# Altium PCB Carrier with Power Supply.PcbDoc (part 2 of 4)
Units mm, origin at the board's own origin, x right, y up, seen from the top; angles counter-clockwise.
Board outline 756.27 x 168 mm, 6 copper layers (Top Layer, Signal Layer 2, Signal Layer 1, VCC, GND, Bottom Layer), stack 1.551 mm thick; 145 components, 326 nets, 1962 pads, 760 vias.
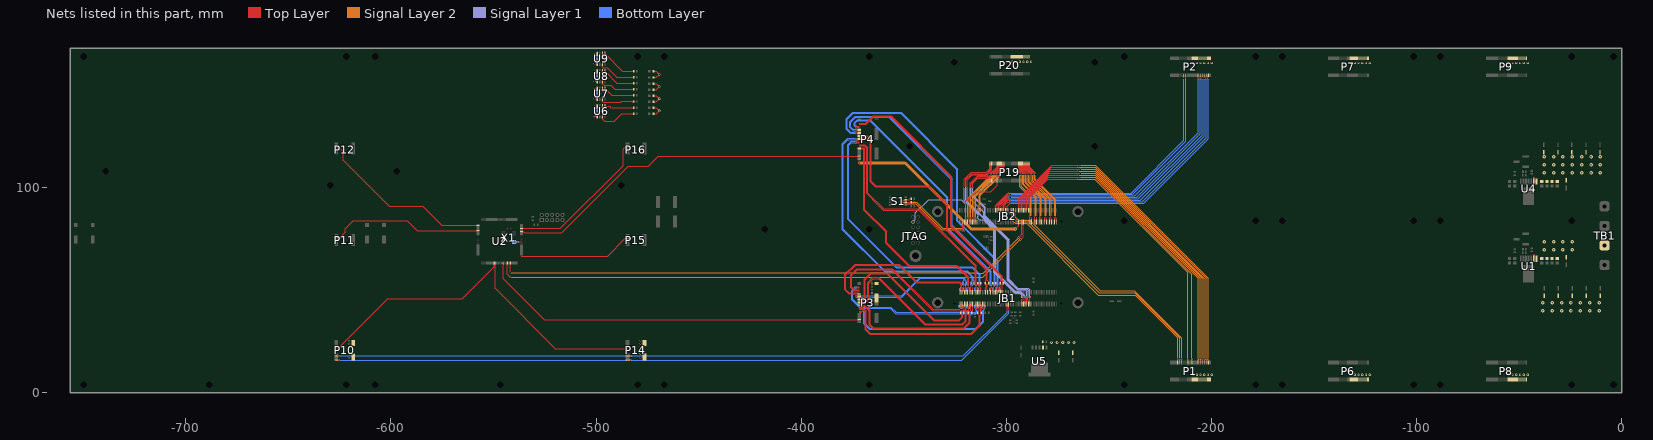
[diagram p6: the nets of this part, all layers, seen from the top]

## Via types
v1: diameter 0.5, hole 0.3, Top Layer to Bottom Layer, 213 vias
v2: diameter 0.9, hole 0.5, Top Layer to Bottom Layer, 182 vias
v3: diameter 0.7, hole 0.3, Top Layer to Bottom Layer, 112 vias
v4: diameter 1.1, hole 0.7, Top Layer to Bottom Layer, 84 vias
v5: diameter 1.5, hole 0.7, Top Layer to Bottom Layer, 59 vias
v6: diameter 1.7, hole 0.7, Top Layer to Bottom Layer, 58 vias
v7: diameter 0.8, hole 0.3, Top Layer to Bottom Layer, 36 vias
v8: diameter 0.9, hole 0.3, Top Layer to Bottom Layer, 6 vias
v9: diameter 1, hole 0.5, Top Layer to Bottom Layer, 4 vias
v10: diameter 1.1, hole 0.5, Top Layer to Bottom Layer, 4 vias
v11: diameter 0.7, hole 0.5, Top Layer to Bottom Layer, 1 vias
v12: diameter 1.3, hole 0.7, Top Layer to Bottom Layer, 1 vias

## Nets (pads, with @x,y where several pads share a name; then routed paths per layer and width w, separated by ;. In a path a pad name is that pad's centre, name@x,y a point inside that pad or via, vN(x,y) a via of type N, cw(c..) or ccw(c..) an arc to the next point about the centre after c; other vN are vias at no path point) (continued)
+5V: C20.1 C21.1 C22.1 C24.1 C25.1 C30.1 C32.1 C33.1 C34.1 C35.1 C37.1 C38.1 C39.1 C40.1 C41.1 C44.1 C45.1 C46.1 C47.1 C48.1 C49.1 C50.1 C51.1 C52.1 C53.1 C54.1 D1.1 D2.1 D3.1 D4.1 D5.1 D6.1 D7.1 D8.1 P1.43 P1.45 P1.47 P1.49 P1.51 P1.53 P1.55 P1.57 P1.59 P1.61 P1.63 P1.65 P1.67 P1.69 P1.71 P1.73 P1.75 P1.77 P1.79 P2.44 P2.46 P2.48 P2.50 P2.52 P2.54 P2.56 P2.58 P2.60 P2.62 P2.64 P2.66 P2.68 P2.70 P2.72 P2.74 P2.76 P2.78 P2.80 P3.2 P3.4 P3.6 P3.8 P3.10 P3.12 P3.14 P3.16 P3.18 P3.20 P3.22 P3.24 P3.26 P3.28 P3.30 P3.32 P3.34 P3.36 P3.38 P3.40 P6.43 P6.45 P6.47 P6.49 P6.51 P6.53 P6.55 P6.57 P6.59 P6.61 P6.63 P6.65 P6.67 P6.69 P6.71 P6.73 P6.75 P6.77 P6.79 P7.44 P7.46 P7.48 P7.50 P7.52 P7.54 P7.56 P7.58 P7.60 P7.62 P7.64 P7.66 P7.68 P7.70 P7.72 P7.74 P7.76 P7.78 P7.80 P8.43 P8.45 P8.47 P8.49 P8.51 P8.53 P8.55 P8.57 P8.59 P8.61 P8.63 P8.65 P8.67 P8.69 P8.71 P8.73 P8.75 P8.77 P8.79 P9.44 P9.46 P9.48 P9.50 P9.52 P9.54 P9.56 P9.58 P9.60 P9.62 P9.64 P9.66 P9.68 P9.70 P9.72 P9.74 P9.76 P9.78 P9.80 P10.2 P10.4 P10.6 P10.8 P10.10 P10.12 P10.14 P10.16 P10.18 P10.20 P10.22 P10.24 P10.26 P10.28 P10.30 P10.32 P10.34 P10.36 P10.38 P10.40 P14.2 P14.4 P14.6 P14.8 P14.10 P14.12 P14.14 P14.16 P14.18 P14.20 P14.22 P14.24 P14.26 P14.28 P14.30 P14.32 P14.34 P14.36 P14.38 P14.40 P20.1 P20.3 P20.5 P20.7 P20.9 P20.11 P20.13 P20.15 P20.17 P20.19 P20.21 P20.23 P20.25 P20.27 P20.29 P20.31 P20.33 P20.35 P20.37 P20.39 R37.2 TB1.2 U1.1 U1.2 U4.1 U4.2 U5.2 U6.1 U6.6 U6.8 U7.1 U7.6 U7.8 U8.1 U8.6 U8.8 U9.1 U9.6 U9.8 | length 77.1
  Top Layer w0.3: v3(-500.763,134.908) U6.1@-499.415,134.908 ; v3(-500.763,139.708) U6.8@-499.415,139.708 ; v3(-500.763,143.425) U7.1@-499.415,143.425 ; v3(-500.763,148.225) U7.8@-499.415,148.225 ; v3(-500.763,151.941) U8.1@-499.415,151.941 ; v3(-500.763,156.741) U8.8@-499.415,156.741 ; v3(-500.763,160.458) U9.1@-499.415,160.458 ; v3(-500.763,165.258) U9.8@-499.415,165.258 ; U6.6@-496.875,139.708 -496.875,138.713 v3(-496.02,137.858) ; U7.6@-496.875,148.225 -496.875,147.23 v3(-496.02,146.375) ; U8.6@-496.875,156.741 -496.875,155.746 v3(-496.02,154.891) ; U9.6@-496.875,165.258 -496.875,164.263 v3(-496.02,163.408) ; P3.40@-363.31,44.298 P3.38@-363.31,44.798 ; P20.39@-298.02,163.828 P20.37@-297.52,163.828
  Top Layer w0.5: D1.1@-472.002,136.021 -470.567,136.021 -469.115,137.473 -470.623,138.981 D2.1@-472.002,138.981 ; D3.1@-472.002,141.94 -470.567,141.94 -469.115,143.392 -470.623,144.9 D4.1@-472.002,144.9 ; D5.1@-472.002,147.86 -470.567,147.86 -469.115,149.312 -470.623,150.82 D6.1@-472.002,150.82 ; D7.1@-472.002,153.779 -470.567,153.779 -469.115,155.231 -470.623,156.739 D8.1@-472.002,156.739
  Top Layer w0.9: U1.2@-42.847,65.469 -42.847,67.129 -42.777,67.199 ; -42.777,104.848 -42.847,104.778 U4.2@-42.847,103.118 U4.1@-41.577,103.118
  Bottom Layer w0.3: v3@-500.763,134.755 -499.415,136.103 C37.1@-499.415,137.218 -499.415,138.206 v3@-500.763,139.555 ; v3(-500.763,143.425) -499.415,144.773 C38.1@-499.415,145.888 -499.415,146.876 v3(-500.763,148.225) ; v3@-500.763,151.845 -499.415,153.193 C39.1@-499.415,154.308 -499.415,155.296 v3@-500.763,156.645 ; v3@-500.763,160.435 -499.415,161.783 C40.1@-499.415,162.898 -499.415,163.886 v3@-500.763,165.235
  other v2: -620.33,17.14 -478.33,17.14 -620.33,19.15 -478.33,19.15 -620.33,21.1 -478.33,21.1 -620.33,22.543 -478.33,22.543 -620.33,23.987 -478.33,23.987 -620.33,25.43 -478.33,25.43 -365.51,45.63 -365.51,48.78 -365.51,50.283 -365.51,51.787 -365.51,53.29
  other v4: -209.02,8.87 -207.186,8.87 -205.352,8.87 -203.518,8.87 -201.684,8.87 -199.85,8.87 -132.02,8.87 -130.186,8.87 -128.352,8.87 -126.518,8.87 -124.684,8.87 -122.85,8.87 -55.02,8.87 -53.186,8.87 -51.352,8.87 -49.518,8.87 -47.684,8.87 -45.85,8.87 -209.02,160.86 -207.186,160.86 -205.352,160.86 -203.518,160.86 -201.684,160.86 -199.85,160.86 -132.02,160.86 -130.186,160.86 -128.352,160.86 -126.518,160.86 -124.684,160.86 -122.85,160.86 -55.02,160.86 -53.186,160.86 -51.352,160.86 -49.518,160.86 -47.684,160.86 -45.85,160.86 -297.064,161.481 -295.23,161.481 -293.396,161.481 -291.562,161.481 -289.728,161.481 -287.894,161.481
  other v5: -277.97,24.66 -275.23,24.66 -272.49,24.66 -269.75,24.66 -267.01,24.66
  other v6: -38.397,40.15 -33.837,40.15 -29.277,40.15 -24.717,40.15 -20.157,40.15 -15.597,40.15 -11.037,40.15 -38.397,44.01 -33.837,44.01 -29.277,44.01 -24.717,44.01 -20.157,44.01 -15.597,44.01 -11.037,44.01 -37.75,69.901 -33.19,69.901 -28.63,69.901 -24.07,69.901 -37.75,73.761 -33.19,73.761 -28.63,73.761 -24.07,73.761 -37.75,107.43 -33.19,107.43 -28.63,107.43 -24.07,107.43 -19.51,107.43 -14.95,107.43 -10.39,107.43 -37.75,111.29 -33.19,111.29 -28.63,111.29 -24.07,111.29 -19.51,111.29 -14.95,111.29 -10.39,111.29 -37.75,115.15 -33.19,115.15 -28.63,115.15 -24.07,115.15 -19.51,115.15 -14.95,115.15 -10.39,115.15
  other v10: -469.15,137.508 -469.15,143.427 -469.15,149.347 -469.15,155.266
ADC_N1: JB1.116 P3.15 R29.1 | length 77.9
  Top Layer w0.3: P3.15@-371.61,50.298 -374.177,50.298 -375.297,51.418 -375.297,57.411 -372.57,60.138 -355.851,60.138 -335.871,40.158 -321.969,40.158 -321.387,40.739 -321.387,41.891 -321.237,42.041 JB1.116@-321.237,43.328
  Bottom Layer w0.3: v1(-321.417,40.758) -321.417,41.398 -321.277,41.538 R29.1@-321.277,42.288
ADC_N2: JB1.117 P3.21 R21.1 | length 81.6
  Top Layer w0.3: P3.21@-371.61,48.798 -376.537,48.798 -378.147,50.408 -378.147,57.571 -373.43,62.288 -352.495,62.288 -343.824,53.617 -322.994,53.617 -321.917,52.541 -321.917,52.058 v1(-322.037,51.938) -322.037,51.541 JB1.117@-322.037,49.391
  Bottom Layer w0.3: R21.1@-322.47,50.268 -322.47,51.018 -322.037,51.451 v1(-322.037,51.938)
ADC_N3: JB1.111 P3.27 R20.2 | length 65.1
  Top Layer w0.3: v1@-373.16,47.298 P3.27@-371.61,47.298 ; JB1.111@-319.637,49.391 v1(-319.637,51.938)
  Bottom Layer w0.3: v1(-373.19,47.398) -351.077,47.398 -342.037,56.438 -321.04,56.438 -320.107,55.505 -320.107,54.818 -319.567,54.278 R20.2@-319.567,53.528 -319.567,52.778 -319.637,52.708 v1(-319.637,51.938)
ADC_N4: JB1.114 P3.33 R28.2 | length 77.7
  Top Layer w0.3: P3.33@-371.61,45.798 -369.892,45.798 -369.28,46.41 -369.28,55.372 -366.138,58.514 -358.087,58.514 -335.23,35.658 -323.067,35.658 -321.707,37.018 -321.707,37.768 -322.257,38.318 R28.2@-322.257,39.068 -320.437,40.888 JB1.114@-320.437,43.168 ; R28.2@-322.377,39.068 R28.2@-322.377,39.195
ADC_N5: JB1.110 P3.39 R27.2 | length 82.1
  Top Layer w0.3: P3.39@-371.61,44.298 -368.994,44.298 -367.607,45.685 -367.607,53.665 -364.988,56.284 -362.027,56.284 -361.88,56.138 -339.394,33.652 -321.344,33.652 -319.947,35.048 -319.947,39.77 -319.189,40.528 -318.937,40.528 v1(-318.837,40.628) -318.687,40.778 -318.687,41.891 -318.837,42.041 JB1.110@-318.837,43.328
  Bottom Layer w0.3: R27.2@-319.257,42.288 -319.257,41.538 -318.837,41.118 v1(-318.837,40.628)
ADC_N6: JB1.106 P3.45 R26.2 | length 72.7
  Top Layer w0.3: P3.45@-371.61,42.798 -369.11,42.798 -366.434,40.122 -366.287,39.975 -366.287,33.268 -364.77,31.751 -320.734,31.751 -317.967,34.518 -317.967,37.788 -318.497,38.318 R26.2@-318.497,39.068 -317.237,40.328 JB1.106@-317.237,43.168
ADC_N7: JB1.96 P3.51 R24.2 | length 80.9
  Top Layer w0.3: P3.51@-371.61,41.298 -369.67,41.298 -368.167,39.795 -368.167,31.001 -366.247,29.081 -317.124,29.081 -313.267,32.938 -313.267,37.748 -313.837,38.318 R24.2@-313.837,39.068 -313.837,39.818 -313.237,40.418 JB1.96@-313.237,43.168
ADC_N8: JB1.92 P3.57 R23.2 | length 78.1
  Top Layer w0.3: P3.57@-371.61,39.798 v1@-370.06,39.798 ; v1(-311.637,40.628) -311.637,41.018 JB1.92@-311.637,43.168
  Bottom Layer w0.3: v1(-370.03,39.898) -369.93,39.798 -369.723,39.798 -368.927,39.002 -368.927,33.901 -366.487,31.461 -314.994,31.461 -311.467,34.988 -311.467,40.458 v1(-311.637,40.628) -311.637,41.098 -312.077,41.538 R23.2@-312.077,42.288
ADC_N9: JB1.81 P4.15 R8.1 | length 120.4
  Top Layer w0.3: v1@-373.16,129.978 P4.15@-371.61,129.978 ; v1(-307.67,51.938) -307.637,51.905 JB1.81@-307.637,49.391
  Bottom Layer w0.3: v1(-373.19,130.078) -373.607,130.495 -373.607,131.618 -372.445,132.78 -366.629,132.78 -328.98,95.131 -328.98,79.981 -307.877,58.878 -307.877,52.288 -307.67,52.081 v1(-307.67,51.938) -307.67,51.408 -308.06,51.018 R8.1@-308.06,50.268
ADC_N10: JB1.77 P4.21 R7.1 | length 134.7
  Top Layer w0.3: v1@-373.16,128.478 P4.21@-371.61,128.478 ; R7.1@-306.64,53.528 -306.04,52.928 v1(-306.04,51.938) -306.037,51.935 JB1.77@-306.037,49.391
  Bottom Layer w0.3: v1(-373.19,128.578) -374.667,128.578 -375.727,129.638 -375.727,132.078 -373.315,134.49 -357.219,134.49 -326.95,104.221 -326.95,81.601 -305.897,60.548 -305.897,52.081 v1(-306.04,51.938)
ADC_N11: JB1.73 P4.27 R6.1 | length 146.8
  Top Layer w0.3: v1@-373.16,126.978 P4.27@-371.61,126.978 ; JB1.73@-304.437,49.391 -304.437,51.541 -304.43,51.548 v1(-304.43,51.938)
  Bottom Layer w0.3: v1(-373.19,127.078) -375.917,127.078 -377.517,128.678 -377.517,133.418 -374.675,136.26 -351.519,136.26 -324.077,108.818 -324.077,83.838 -304.297,64.058 -304.297,52.071 v1(-304.43,51.938) -304.43,51.458 -304.87,51.018 R6.1@-304.87,50.268
ADC_N12: JB1.85 P4.33 R9.2 | length 119.9
  Top Layer w0.3: P4.33@-371.61,125.478 -367.64,125.478 -366.057,123.895 -365.79,123.628 -365.79,103.124 -363.567,100.901 -337.77,100.901 -335.535,98.665 -329.477,92.608 -328.417,91.548 -328.417,79.358 -317.497,68.438 -309.167,60.108 -309.167,54.825 -308.62,54.278 R9.2@-308.62,53.528 -309.207,52.941 -309.207,51.571 -309.237,51.541 JB1.85@-309.237,49.391
ADC_N13: JB1.105 P4.39 R13.1 | length 131.4
  Top Layer w0.3: v1@-373.16,123.978 P4.39@-371.61,123.978 ; JB1.105@-317.237,49.391 v1(-317.237,51.938)
  Bottom Layer w0.3: v1(-373.19,124.078) -377.348,124.078 -379.851,121.575 -379.997,121.428 -379.997,79.621 -359.337,58.961 -319.307,58.961 -316.627,56.281 -316.627,54.811 -317.157,54.281 R13.1@-317.157,53.531 -317.157,52.018 v1(-317.237,51.938)
ADC_N14: JB1.95 P4.45 R11.1 | length 128
  Top Layer w0.3: v1@-373.16,122.478 P4.45@-371.61,122.478 ; R11.1@-313.98,53.528 -313.407,52.955 -313.407,52.108 v1(-313.237,51.938) JB1.95@-313.237,49.391
  Bottom Layer w0.3: v1(-373.19,122.578) -375.558,122.578 -377.227,120.908 -377.227,84.551 -353.747,61.071 -316.71,61.071 -313.087,57.448 -313.087,52.088 v1(-313.237,51.938)
ADC_N15: JB1.97 P4.51 R12.2 | length 108.9
  Top Layer w0.3: P4.51@-371.61,120.978 -369.007,120.978 -367.47,119.441 -367.47,97.454 -359.696,89.68 -342.343,89.68 -314.717,62.055 -314.717,52.741 -314.037,52.061 JB1.97@-314.037,49.391
  Bottom Layer w0.3: v1(-314.007,51.901) -314.007,51.355 -313.67,51.018 R12.2@-313.67,50.268
ADC_N16: JB1.107 P4.57 R14.2 | length 109
  Top Layer w0.3: P4.57@-371.61,119.478 -369.501,119.478 -368.88,118.857 -368.88,89.26 -358.33,78.71 -358.33,73.201 -347.41,62.281 -324.09,62.281 -318.187,56.378 -318.187,52.088 v1(-318.037,51.938) JB1.107@-318.037,49.391
  Bottom Layer w0.3: v1(-318.037,51.938) -318.037,51.425 -317.63,51.018 R14.2@-317.63,50.268
ADC_P1: JB1.118 P3.17 R29.2 | length 78.8
  Top Layer w0.3: P3.17@-371.61,49.798 -374.384,49.798 -375.797,51.211 -375.797,57.618 -372.777,60.638 -355.643,60.638 -335.683,40.678 -322.297,40.678 v1(-322.217,40.758) -322.037,40.938 JB1.118@-322.037,43.328
  Bottom Layer w0.3: R29.2@-322.877,42.288 -322.217,41.628 v1(-322.217,40.758)
ADC_P2: JB1.115 P3.23 R21.2 | length 84.1
  Top Layer w0.3: P3.23@-371.61,48.298 -376.744,48.298 -378.501,50.054 -378.647,50.201 -378.647,57.778 -373.637,62.788 -352.287,62.788 -343.617,54.117 -322.787,54.117 -321.417,52.748 -321.417,52.118 v1(-321.237,51.938) JB1.115@-321.237,49.391
  Bottom Layer w0.3: v1(-321.237,51.938) -321.237,51.385 -320.87,51.018 R21.2@-320.87,50.268
ADC_P3: JB1.113 P3.29 R20.1 | length 64.7
  Top Layer w0.3: v1@-373.16,46.798 P3.29@-371.61,46.798 ; JB1.113@-320.437,49.391 -320.437,51.541 v1(-320.437,51.938)
  Bottom Layer w0.3: v1(-373.19,46.698) -351.07,46.698 -341.83,55.938 -321.247,55.938 -320.607,55.298 -320.607,54.838 -321.167,54.278 R20.1@-321.167,53.528 -320.437,52.798 v1(-320.437,51.938)
ADC_P4: JB1.112 P3.35 R28.1 | length 78.1
  Top Layer w0.3: P3.35@-371.61,45.298 -369.685,45.298 -368.78,46.203 -368.78,55.165 -365.931,58.014 -358.294,58.014 -335.437,35.158 -322.86,35.158 -321.207,36.811 -321.207,37.768 -320.657,38.318 R28.1@-320.657,39.068 -320.657,39.767 -319.637,40.787 JB1.112@-319.637,43.168
ADC_P5: JB1.108 P3.41 R27.1 | length 83
  Top Layer w0.3: P3.41@-371.61,43.798 -368.787,43.798 -367.107,45.478 -367.107,53.458 -364.781,55.784 -362.234,55.784 -339.747,33.298 -339.601,33.152 -321.137,33.152 -319.447,34.841 -319.447,39.563 -318.982,40.028 -318.589,40.028 -318.187,40.429 -318.187,41.891 -318.037,42.041 JB1.108@-318.037,43.328
  Bottom Layer w0.3: v1(-318.037,40.628) -318.037,41.158 -317.657,41.538 R27.1@-317.657,42.288
ADC_P6: JB1.104 P3.47 R26.1 | length 73.2
  Top Layer w0.3: P3.47@-371.61,42.298 -369.317,42.298 -366.787,39.768 -366.787,33.061 -364.977,31.251 -320.527,31.251 -320.514,31.264 -317.467,34.311 -317.467,37.748 -316.897,38.318 R26.1@-316.897,39.068 -316.897,39.818 -316.437,40.278 JB1.104@-316.437,43.168
ADC_P7: JB1.94 P3.53 R24.1 | length 81.5
  Top Layer w0.3: P3.53@-371.61,40.798 -369.877,40.798 -368.667,39.588 -368.667,30.794 -366.521,28.648 -366.455,28.581 -316.917,28.581 -316.85,28.648 -312.767,32.731 -312.767,37.788 -312.237,38.318 R24.1@-312.237,39.068 -312.237,39.818 -312.437,40.018 JB1.94@-312.437,43.168
ADC_P8: JB1.90 P3.59 R23.1 | length 78.9
  Top Layer w0.3: P3.59@-371.61,39.298 v1@-370.06,39.298 ; v1(-310.837,40.628) JB1.90@-310.837,43.168
  Bottom Layer w0.3: v1(-370.03,39.198) -369.93,39.298 -369.427,38.795 -369.427,33.694 -366.694,30.961 -314.787,30.961 -310.967,34.781 -310.967,40.498 v1(-310.837,40.628) -310.837,41.178 -310.477,41.538 R23.1@-310.477,42.288
ADC_P9: JB1.79 P4.17 R8.2 | length 123.2
  Top Layer w0.3: v1@-373.16,129.478 P4.17@-371.61,129.478 ; JB1.79@-306.837,49.391 -306.837,51.921 v1(-306.82,51.938)
  Bottom Layer w0.3: v1(-373.19,129.378) -373.339,129.378 -374.107,130.147 -374.107,131.825 -372.652,133.28 -366.422,133.28 -328.48,95.338 -328.48,80.188 -307.377,59.085 -307.377,52.495 v1(-306.82,51.938) -306.82,51.378 -306.46,51.018 R8.2@-306.46,50.268
ADC_P10: JB1.75 P4.23 R7.2 | length 137.1
  Top Layer w0.3: v1@-373.16,127.978 P4.23@-371.61,127.978 ; JB1.75@-305.237,49.391 -305.237,51.931 v1(-305.23,51.938) -305.23,53.338 R7.2@-305.04,53.528
  Bottom Layer w0.3: v1(-373.19,127.878) -374.674,127.878 -376.081,129.284 -376.227,129.431 -376.227,132.285 -376.081,132.432 -374.121,134.392 -373.522,134.99 -357.012,134.99 -326.45,104.428 -326.45,81.808 -305.397,60.755 -305.397,52.105 v1(-305.23,51.938)
ADC_P11: JB1.71 P4.29 R6.2 | length 149.4
  Top Layer w0.3: v1@-373.16,126.478 P4.29@-371.61,126.478 ; v1(-303.66,51.938) -303.66,51.564 -303.637,51.541 JB1.71@-303.637,49.391
  Bottom Layer w0.3: v1(-373.19,126.378) -373.339,126.378 -373.539,126.578 -376.124,126.578 -378.017,128.471 -378.017,133.625 -374.882,136.76 -351.312,136.76 -323.577,109.025 -323.577,84.045 -303.797,64.265 -303.797,52.075 v1(-303.66,51.938) -303.66,51.408 -303.27,51.018 R6.2@-303.27,50.268
ADC_P12: JB1.87 P4.35 R9.1 | length 119.1
  Top Layer w0.3: P4.35@-371.61,124.978 -367.847,124.978 -366.29,123.421 -366.29,102.917 -363.774,100.401 -337.978,100.401 -328.917,91.341 -328.917,79.151 -309.667,59.901 -309.667,54.831 -310.22,54.278 R9.1@-310.22,53.528 -309.707,53.015 -309.707,51.871 -310.037,51.541 JB1.87@-310.037,49.391
ADC_P13: JB1.103 P4.41 R13.2 | length 130.9
  Top Layer w0.3: v1@-373.16,123.478 P4.41@-371.61,123.478 ; JB1.103@-316.437,49.391 v1(-316.437,51.938)
  Bottom Layer w0.3: v1(-373.19,123.378) -377.34,123.378 -379.497,121.221 -379.497,79.828 -359.13,59.461 -319.1,59.461 -316.127,56.488 -316.127,54.851 -315.557,54.281 R13.2@-315.557,53.531 -316.437,52.651 v1(-316.437,51.938)
ADC_P14: JB1.93 P4.47 R11.2 | length 127.2
  Top Layer w0.3: v1@-373.16,121.978 P4.47@-371.61,121.978 ; JB1.93@-312.437,49.391 v1(-312.437,51.938) -312.437,51.987 -312.907,52.457 -312.907,53.001 R11.2@-312.38,53.528
  Bottom Layer w0.3: v1(-373.19,121.878) -375.55,121.878 -376.727,120.701 -376.727,84.758 -353.54,61.571 -316.503,61.571 -312.587,57.655 -312.587,52.088 v1(-312.437,51.938)
ADC_P15: JB1.99 P4.53 R12.1 | length 108
  Top Layer w0.3: P4.53@-371.61,120.478 -369.215,120.478 -367.97,119.234 -367.97,97.246 -362.535,91.811 -359.904,89.18 -342.55,89.18 -315.217,61.847 -315.217,52.534 -314.837,52.154 JB1.99@-314.837,49.391
  Bottom Layer w0.3: R12.1@-315.27,50.268 -315.27,51.018 -314.807,51.481 v1(-314.807,51.901)
ADC_P16: JB1.109 P4.59 R14.1 | length 108.2
  Top Layer w0.3: P4.59@-371.61,118.978 -369.708,118.978 -369.38,118.65 -369.38,89.053 -358.83,78.503 -358.83,72.993 -347.618,61.781 -324.298,61.781 -318.687,56.171 -318.687,52.088 v1(-318.837,51.938) -318.837,51.541 JB1.109@-318.837,49.391
  Bottom Layer w0.3: R14.1@-319.23,50.268 -319.23,51.018 -318.837,51.411 v1(-318.837,51.938)
ADCLK: JB2.48 P4.79 | length 95.2
  Top Layer w0.3: v12(-295.65,79.92) -294.037,81.533 JB2.48@-294.037,83.328
  Top Layer w0.4: v11(-371.617,112.081) -371.61,112.088 P4.79@-371.61,113.911
  Signal Layer 2 w1.5: v11(-371.617,112.081) -349.281,112.081 -317.12,79.92 v12(-295.65,79.92)
ADCLK_N1: JB1.98 P3.9 R25.1 | length 79.2
  Top Layer w0.3: v1@-373.16,51.798 P3.9@-371.61,51.798 ; JB1.98@-314.037,43.328 -314.037,42.041 -314.187,41.891 -314.187,40.778 v1(-314.037,40.628)
  Bottom Layer w0.3: v1(-373.19,51.898) -373.339,51.898 -375.427,49.809 -375.427,45.521 -371.281,41.374 -371.134,41.228 -356.444,41.228 -354.851,39.634 -353.934,38.718 -314.8,38.718 -314.177,39.341 -314.177,40.488 v1(-314.037,40.628) -314.037,41.178 -313.677,41.538 R25.1@-313.677,42.288
ADCLK_N2: JB1.67 P4.9 R5.2 | length 125.6
  Top Layer w0.3: P4.9@-371.61,131.478 -368.532,131.478 -364.876,135.134 -356.197,135.134 -326.467,105.405 -326.467,81.245 -316.82,71.598 -301.997,56.775 -301.997,54.835 -301.44,54.278 R5.2@-301.44,53.528 -302.037,52.931 JB1.67@-302.037,49.391
ADCLK_P1: JB1.100 P3.11 R25.2 | length 76.6
  Top Layer w0.3: v1@-373.16,51.298 P3.11@-371.61,51.298 ; v1(-314.837,40.628) -314.687,40.778 -314.687,41.891 -314.837,42.041 JB1.100@-314.837,43.328
  Bottom Layer w0.3: v1(-373.19,51.198) -374.927,49.461 -374.927,45.728 -370.927,41.728 -356.237,41.728 -353.727,39.218 -315.007,39.218 -314.677,39.548 -314.677,40.468 v1(-314.837,40.628) -314.837,41.098 -315.277,41.538 R25.2@-315.277,42.288
ADCLK_P2: JB1.69 P4.11 R5.1 | length 124.6
  Top Layer w0.3: P4.11@-371.61,130.978 -368.325,130.978 -364.668,134.634 -356.404,134.634 -326.967,105.198 -326.967,81.038 -302.497,56.568 -302.497,54.821 -303.04,54.278 R5.1@-303.04,53.528 -302.837,53.325 JB1.69@-302.837,49.391
BOARD_STAT: JB2.112 JTAG.9 P19.66 | length 64
  Top Layer w0.2: v1(-319.637,91.92) -319.637,93.393 -314.95,98.08 -307.602,98.08 -304.52,101.162 P19.66@-304.52,103.523
  Top Layer w0.4: JB2.112@-319.637,83.328 v1(-319.637,85.318)
  Signal Layer 1 w0.3: JTAG.9@-345.527,83.328 -344.258,84.598 -344.258,87.732 -337.71,94.28 -321.997,94.28 v1(-319.637,91.92)
  Bottom Layer w0.3: v1(-319.637,85.318) v1(-319.637,91.92)
BOOT_MODE1: JB2.116 R16.1 S1.2 | length 43.5
  Top Layer w0.3: v1(-321.237,78.97) JB2.116@-321.237,83.328
  Top Layer w0.4: v1(-350.51,92.33) -350.44,92.4 -349.42,92.4 S1.2@-348.93,92.89 -346.47,92.89 R16.1@-346.43,92.85
  Signal Layer 2 w0.3: v1(-350.51,92.33) -344.101,92.33 -331.341,79.57 -321.837,79.57 v1(-321.237,78.97)
BOOT_MODE2: JB2.114 R15.1 S1.3 | length 45.3
  Top Layer w0.3: v1(-320.437,78.97) JB2.114@-320.437,83.328
  Top Layer w0.4: v1(-350.52,93.08) -350.52,93.49 -349.85,94.16 S1.3@-348.93,94.16 -347.41,94.16 -346.98,94.59 R15.1@-346.43,94.59
  Signal Layer 2 w0.3: v1(-350.52,93.08) -343.72,93.08 -331.01,80.37 -321.789,80.37 -320.437,79.019 v1(-320.437,78.97)
BUFF_LED1: R38.1 U6.3 | length 18.4
  Top Layer w0.5: U6.3@-496.875,134.908 -496.875,133.663 -495.75,132.538 -491.15,132.538 -487.53,136.158 -482.248,136.158 -482.24,136.15 R38.1@-481.64,136.15
BUFF_LED2: R39.1 U6.5 | length 14.2
  Top Layer w0.5: U6.5@-495.605,139.708 -493.317,139.708 -492.718,139.11 R39.1@-481.64,139.11
BUFF_LED3: R40.1 U7.3 | length 16.9
  Top Layer w0.5: U7.3@-496.875,143.425 -496.875,142.143 -496.35,141.618 -487.987,141.618 -487.53,142.075 -482.246,142.075 -482.24,142.069 R40.1@-481.64,142.069
BUFF_LED4: R41.1 U7.5 | length 15.3
  Top Layer w0.5: U7.5@-495.605,148.225 -492.409,145.029 R41.1@-481.64,145.029
BUFF_LED5: R42.1 U8.3 | length 17.6
  Top Layer w0.5: U8.3@-496.875,151.941 -496.875,150.783 -496.1,150.008 -492.8,150.008 -490.784,147.992 -486.78,147.992 -486.777,147.989 R42.1@-481.64,147.989
BUFF_LED6: R43.1 U8.5 | length 16.4
  Top Layer w0.5: U8.5@-495.605,156.741 -489.792,150.928 -482.261,150.928 -482.24,150.949 R43.1@-481.64,150.949
BUFF_LED7: R44.1 U9.3 | length 18.7
  Top Layer w0.5: U9.3@-496.875,160.458 -496.875,159.103 -496.39,158.618 -494.61,158.618 -489.9,153.908 -486.78,153.908 R44.1@-481.64,153.908
BUFF_LED8: R45.1 U9.5 | length 17.4
  Top Layer w0.5: U9.5@-495.605,165.258 -487.23,156.883 -487.23,156.868 R45.1@-481.64,156.868
CAN_RX: JB2.93 P19.51 | length 27.6
  Top Layer w0.3: v1(-303.039,106.588) -303.039,107.33 -301.02,109.349 P19.51@-301.02,111.823
  Top Layer w0.4: JB2.93@-312.437,89.056 v1(-312.437,91.046)
  Signal Layer 2 w0.3: v1(-312.437,91.046) -312.587,91.196 -312.587,96.433 -303.039,105.981 v1(-303.039,106.588)
CAN_TX: JB2.95 P19.53 | length 27.6
  Top Layer w0.3: v1(-303.762,106.588) -303.762,107.314 -301.52,109.556 P19.53@-301.52,111.823
  Top Layer w0.4: JB2.95@-313.237,89.056 v1(-313.237,91.046)
  Signal Layer 2 w0.3: v1(-313.237,91.046) -313.087,91.196 -313.087,96.64 -303.762,105.965 v1(-303.762,106.588)
CLOCK_S_ADC: JB1.60 P10.39 P14.39 | length 343.3
  Top Layer w0.3: P10.39@-626.69,16.054 v8(-625.164,16.054) ; P14.39@-484.69,16.054 v8(-483.164,16.054)
  Top Layer w0.4: v3(-298.837,40.391) JB1.60@-298.837,43.328
  Bottom Layer w0.4: v8(-625.164,16.054) v8(-483.164,16.054) -321.714,16.054 -298.837,38.931 v3(-298.837,40.391)
CPLD_CLOCK: U2.18 X1.3 | length 3.5
  Top Layer w0.3: v9(-538.267,73.585) -538.174,73.678 U2.18@-536.33,73.678
  Bottom Layer w1: X1.3@-539.797,73.675 -539.794,73.678 -539.701,73.585 v9(-538.267,73.585)
CS1: P3.73 U2.130 | length 189.5
  Top Layer w0.25: U2.130@-545.197,63.311 -545.197,55.661 -525.334,35.798 P3.73@-371.61,35.798
CS2: P4.73 U2.28 | length 180.5
  Top Layer w0.25: U2.28@-536.33,78.678 -536.295,78.642 -535.322,78.642 -534.738,78.058 -516.807,78.058 -484.274,110.591 -474.455,110.591 -469.568,115.478 P4.73@-371.61,115.478
CS_S_ADC: JB1.62 P10.31 P14.31 | length 341.3
  Top Layer w0.3: P10.31@-626.69,18.054 v8(-625.164,18.054) ; P14.31@-484.69,18.054 v8(-483.164,18.054)
  Top Layer w0.4: v3(-299.637,39.711) JB1.62@-299.637,43.328
  Bottom Layer w0.4: v8(-625.164,18.054) v8(-483.164,18.054) -320.994,18.054 -299.637,39.411 v3(-299.637,39.711)
ELED0_1: JB2.34 P19.23 | length 31.2
  Top Layer w0.3: P19.23@-294.02,111.918 -294.02,107.748 -293.646,107.373 v1(-293.646,106.588)
  Top Layer w0.4: JB2.34@-288.437,83.168 JB2.34@-288.437,83.328 v1(-288.437,86.028)
  Signal Layer 2 w0.3: v1(-293.646,106.588) -293.523,106.465 -293.523,106.014 -293.337,105.828 -293.337,100.608 -288.287,95.558 -288.287,86.178 v1(-288.437,86.028)
ELED0_2: JB2.16 P19.11 | length 32.9
  Top Layer w0.25: P19.11@-291.02,111.918 -291.02,109.68 -291.02,108.974 -289.31,107.264 v1(-289.31,106.588)
  Top Layer w0.4: JB2.16@-281.237,83.168 JB2.16@-281.237,83.328 v1(-281.237,86.028)
  Signal Layer 2 w0.3: v1(-289.31,106.588) -289.188,106.465 -289.188,105.918 -289.187,102.638 -281.087,94.538 -281.087,86.178 v1(-281.237,86.028)
ELED1_1: JB2.32 P19.21 | length 31.2
  Top Layer w0.3: P19.21@-293.52,111.918 -293.52,107.955 -292.923,107.358 v1(-292.923,106.588)
  Top Layer w0.4: JB2.32@-287.637,83.168 JB2.32@-287.637,83.328 v1(-287.637,86.028)
  Signal Layer 2 w0.3: v1(-292.923,106.588) -292.801,106.465 -292.801,100.778 -287.787,95.765 -287.787,86.178 v1(-287.637,86.028)
ELED1_2: JB2.14 P19.9 | length 33
  Top Layer w0.25: P19.9@-290.52,111.918 -290.52,109.11 -288.588,107.178 v1(-288.588,106.588)
  Top Layer w0.4: JB2.14@-280.437,83.168 v1(-280.437,86.028)
  Signal Layer 2 w0.3: v1(-288.588,106.588) -288.687,106.488 -288.687,102.845 -280.587,94.745 -280.587,86.178 v1(-280.437,86.028)
ENC1A: JB1.36 P19.78 | length 85.2
  Top Layer w0.3: v1(-316.97,100.7) -316.97,102.237 -313.929,105.278 -308.23,105.278 -307.52,104.568 P19.78@-307.52,103.523
  Top Layer w0.4: JB1.36@-289.237,43.328 v7(-289.237,46.105)
  Signal Layer 1 w0.2: v1(-316.97,100.7) -316.97,96.48 -310.6,90.11 -310.6,86.092 -299.01,74.502 -299.01,55.142 -294.498,50.63 -289.73,50.63 -289.237,50.137 v7(-289.237,46.105)
ENC1B: JB1.38 P19.76 | length 86.6
  Top Layer w0.3: v1(-317.68,100.09) -317.68,102.234 -313.945,105.969 -308.214,105.969 -307.02,104.775 P19.76@-307.02,103.523
  Top Layer w0.4: JB1.38@-290.037,43.328 v7(-290.037,46.785)
  Signal Layer 1 w0.2: v1(-317.68,100.09) -317.68,94.711 -311,88.031 -311,85.884 -299.44,74.324 -299.44,54.964 -294.676,50.2 -290.84,50.2 -290.037,49.397 v7(-290.037,46.785)
ENC1C: JB1.34 P19.80 | length 83.6
  Top Layer w0.3: v1(-316.31,100.09) -316.31,102.19 -313.962,104.538 -308.197,104.538 -308.02,104.361 P19.80@-308.02,103.523
  Top Layer w0.4: JB1.34@-288.437,43.328 v7(-288.437,46.785)
  Signal Layer 1 w0.2: v1(-316.31,100.09) -316.31,96.428 -310.587,90.706 ; -310.587,90.705 -310.19,90.307 -310.19,86.29 -298.58,74.68 -298.58,55.32 -294.32,51.06 -289.18,51.06 -288.437,50.317 v7(-288.437,46.785)
ENC2A: JB1.42 P19.77 | length 90.9
  Top Layer w0.3: v1(-319.73,100.7) -319.73,104.077 -316.838,106.969 -314.359,106.969 -309.554,106.969 -307.52,109.003 P19.77@-307.52,111.823
  Top Layer w0.4: JB1.42@-291.637,43.328 v7(-291.637,46.785)
  Signal Layer 1 w0.2: v1(-319.73,100.7) -319.73,93.618 -312.206,86.094 -311.816,85.704 -311.816,85.537 -305.63,79.351 -305.63,58.944 -295.786,49.1 -293.284,49.1 -291.637,47.453 v7(-291.637,46.785)
ENC2B: JB1.40 P19.75 | length 90.9
  Top Layer w0.3: v1(-319.07,100.09) -319.07,104.03 -316.631,106.469 -314.152,106.469 -309.347,106.469 -307.02,108.796 P19.75@-307.02,111.823
  Top Layer w0.4: JB1.40@-290.837,43.328 v7(-290.837,46.105)
  Signal Layer 1 w0.2: v1(-319.07,100.09) -319.07,93.524 -311.533,85.987 -311.416,85.87 -311.416,85.703 -305.23,79.517 -305.23,59.11 -295.62,49.5 -293.119,49.5 -290.837,47.219 v7(-290.837,46.105)
ENC2C: JB1.44 P19.79 | length 92.2
  Top Layer w0.3: v1(-320.44,100.09) -320.44,104.074 -317.045,107.469 -309.761,107.469 -308.02,109.21 P19.79@-308.02,111.823
  Top Layer w0.4: JB1.44@-292.437,43.328 v7(-292.437,46.105)
  Signal Layer 1 w0.2: v1(-320.44,100.09) -320.44,93.649 -313.61,86.819 -313.61,86.222 -313.8,86.032 -313.8,85.058 -313.06,84.318 -311.163,84.318 -306.03,79.185 -306.03,58.779 -295.951,48.7 -293.45,48.7 -292.437,47.687 v7(-292.437,46.105)
EOC1: P10.15 U2.121 | length 95.1
  Top Layer w0.25: P10.15@-626.69,22.054 -625.493,22.054 -601.561,45.986 -565.22,45.986 -549.707,61.498 U2.121@-549.707,63.3
EOC2: P11.15 U2.80 | length 75.5
  Top Layer w0.25: P11.15@-626.69,75.804 -624.774,75.804 -622.32,78.258 -622.32,80.008 -618.407,83.921 -591.907,83.921 -587.164,79.178 U2.80@-557.564,79.178
EOC3: P12.15 U2.75 | length 87.4
  Top Layer w0.25: P12.15@-626.69,119.908 -626.665,119.883 -625.655,119.883 -623.277,117.505 -623.277,113.421 -600.794,90.938 -584.447,90.938 -575.187,81.678 U2.75@-557.564,81.678
EOC4: P14.17 U2.122 | length 89.1
  Top Layer w0.25: U2.122@-549.197,63.311 -549.197,50.935 -519.816,21.554 P14.17@-484.69,21.554
EOC5: P15.17 U2.4 | length 55.2
  Top Layer w0.25: U2.4@-536.33,66.678 -494.341,66.678 -485.715,75.304 P15.17@-484.69,75.304
EOC6: P16.17 U2.31 | length 72.5
  Top Layer w0.25: U2.31@-536.325,80.173 -517.505,80.173 -486.82,110.858 -486.82,118.738 -486.15,119.408 P16.17@-484.69,119.408
EOC_AND1: JB2.42 U2.134 | length 273
  Top Layer w0.25: U2.134@-543.197,63.311 -543.197,57.811 v3(-541.727,56.341)
  Top Layer w0.4: v2(-293.07,74.81) -291.637,76.243 JB2.42@-291.637,83.328
  Signal Layer 2 w0.5: v3(-541.727,56.341) -311.539,56.341 v2(-293.07,74.81)
EOC_AND2: JB2.44 U2.137 | length 268
  Top Layer w0.25: v3(-541.697,58.575) U2.137@-541.697,63.311
  Top Layer w0.4: v2(-294.004,75.744) -292.437,77.311 JB2.44@-292.437,83.328
  Signal Layer 2 w0.5: v3(-541.697,58.575) -316.729,58.575 -316.592,58.438 -316.499,58.531 -315.836,58.531 -315.743,58.438 -311.311,58.438 v2(-294.004,75.744)
ERX1_N: JB2.28 P19.19 | length 31.9
  Top Layer w0.3: -293.02,109.473 P19.19@-293.02,111.918 ; -293.02,109.473 -293.02,108.162 -292.089,107.231 -292.089,106.699 v1(-292.201,106.588)
  Top Layer w0.4: JB2.28@-286.037,83.168 JB2.28@-286.037,83.328 v1(-286.037,86.028)
  Signal Layer 2 w0.3: v1(-292.201,106.588) -292.078,106.465 -292.078,105.769 ; -292.077,105.768 -292.077,101.628 -285.887,95.438 -285.887,86.178 v1(-286.037,86.028)
ERX1_P: JB2.26 P19.17 | length 31.8
  Top Layer w0.3: P19.17@-292.52,111.918 -292.52,109.68 -292.52,108.369 -291.589,107.438 -291.589,106.699 v1(-291.478,106.588)
  Top Layer w0.4: JB2.26@-285.237,83.168 JB2.26@-285.237,83.328 v1(-285.237,86.028)
  Signal Layer 2 w0.3: v1(-291.478,106.588) -291.577,106.489 -291.577,101.835 -285.387,95.645 -285.387,86.178 v1(-285.237,86.028)
ERX2_N: JB2.10 P19.7 | length 33.6
  Top Layer w0.3: P19.7@-290.02,111.918 -290.02,109.283 -287.754,107.017 -287.754,106.699 v1(-287.865,106.588)
  Top Layer w0.4: JB2.10@-278.837,83.168 v1(-278.837,86.028)
  Signal Layer 2 w0.3: v1(-287.865,106.588) -287.743,106.465 -287.743,106.339 -287.717,106.314 -287.717,103.178 -278.687,94.148 -278.687,86.178 v1(-278.837,86.028)
ERX2_P: JB2.8 P19.5 | length 33.6
  Top Layer w0.3: P19.5@-289.52,111.918 -289.52,109.49 -287.254,107.224 -287.254,106.699 v1(-287.143,106.588)
  Top Layer w0.4: JB2.8@-278.037,83.168 JB2.8@-278.037,83.328 v1(-278.037,86.028)
  Signal Layer 2 w0.3: v1(-287.143,106.588) -287.217,106.513 -287.217,103.385 -278.187,94.355 -278.187,86.178 v1(-278.037,86.028)
ESD_CLK: JB2.106 P19.61 | length 34.2
  Top Layer w0.16: v1(-306.652,106.588) -306.652,106.803 -303.52,109.935 P19.61@-303.52,111.823
  Top Layer w0.4: JB2.106@-317.237,83.328 v1(-317.237,85.318)
  Signal Layer 2 w0.2: v1(-317.237,85.318) -317.237,95.342 -306.652,105.927 v1(-306.652,106.588)
ESD_CMD: JB2.104 P19.59 | length 34.1
  Top Layer w0.16: v1(-305.93,106.588) -305.93,106.87 -303.02,109.78 P19.59@-303.02,111.823
  Top Layer w0.4: JB2.104@-316.437,83.328 v1(-316.437,85.318)
  Signal Layer 2 w0.2: v1(-316.437,85.318) -316.437,95.505 -305.93,106.013 v1(-305.93,106.588)
ESD_DAT0: JB2.108 P19.63 | length 34.3
  Top Layer w0.16: v1(-307.375,106.588) -307.375,106.8 -304.02,110.155 P19.63@-304.02,111.823
  Top Layer w0.4: JB2.108@-318.037,83.328 v1(-318.037,85.318)
  Signal Layer 2 w0.2: v1(-318.037,85.318) -318.037,95.178 -307.375,105.841 v1(-307.375,106.588)
ESD_DAT1: JB2.110 P19.65 | length 34.4
  Top Layer w0.16: v1(-308.097,106.588) -308.097,106.773 -304.52,110.35 P19.65@-304.52,111.823
  Top Layer w0.4: JB2.110@-318.837,83.328 v1(-318.837,85.318)
  Signal Layer 2 w0.2: v1(-318.837,85.318) -318.837,95.015 -308.097,105.755 v1(-308.097,106.588)
ESD_DAT2: JB2.100 P19.55 | length 33.8
  Top Layer w0.2: v1(-304.485,106.588) -304.485,107.228 -302.02,109.692 P19.55@-302.02,111.823
  Top Layer w0.4: JB2.100@-314.837,83.328 v1(-314.837,85.318)
  Signal Layer 2 w0.2: v1(-314.837,85.318) -314.837,95.833 -304.485,106.185 v1(-304.485,106.588)
ESD_DAT3: JB2.102 P19.57 | length 33.9
  Top Layer w0.16: v1(-305.207,106.588) -305.207,107.043 -302.52,109.73 P19.57@-302.52,111.823
  Top Layer w0.4: JB2.102@-315.637,83.328 v1(-315.637,85.318)
  Signal Layer 2 w0.2: v1(-315.637,85.318) -315.637,95.669 -305.207,106.099 v1(-305.207,106.588)
ETX1_N: JB2.22 P19.15 | length 32.4
  Top Layer w0.3: P19.15@-292.02,111.918 -292.02,108.576 -290.644,107.2 -290.644,106.699 v1(-290.756,106.588)
  Top Layer w0.4: JB2.22@-283.637,83.168 JB2.22@-283.637,83.328 v1(-283.637,86.028)
  Signal Layer 2 w0.3: v1(-290.756,106.588) -290.647,106.48 -290.647,102.358 -283.487,95.198 -283.487,86.178 v1(-283.637,86.028)
ETX1_P: JB2.20 P19.13 | length 32.4
  Top Layer w0.3: -291.52,109.617 -291.52,108.783 -290.144,107.407 -290.144,106.699 v1(-290.033,106.588) ; -291.52,109.617 P19.13@-291.52,111.918
  Top Layer w0.4: JB2.20@-282.837,83.168 JB2.20@-282.837,83.328 v1(-282.837,86.028)
  Signal Layer 2 w0.3: v1(-290.033,106.588) -290.147,106.473 -290.147,102.565 -282.987,95.405 -282.987,86.178 v1(-282.837,86.028)
ETX2_N: JB2.4 P19.3 | length 34.2
  Top Layer w0.3: P19.3@-289.02,111.918 -289.02,109.697 -288.798,109.475 -286.333,107.01 -286.309,107.01 -286.309,106.699 v1(-286.42,106.588)
  Top Layer w0.4: JB2.4@-276.437,83.168 JB2.4@-276.437,83.328 v1(-276.437,86.028)
  Signal Layer 2 w0.3: v1(-286.42,106.588) -286.347,106.515 -286.347,104.048 -276.287,93.988 -276.287,86.178 v1(-276.437,86.028)
ETX2_P: JB2.2 P19.1 | length 34.2
  Top Layer w0.3: P19.1@-288.52,111.918 -288.52,109.904 -286.126,107.51 -286.102,107.51 -285.809,107.217 -285.809,106.699 v1(-285.697,106.588)
  Top Layer w0.4: JB2.2@-275.637,83.168 v1(-275.637,86.028)
  Signal Layer 2 w0.3: v1(-285.697,106.588) -285.82,106.465 -285.82,106.035 -285.847,106.008 -285.847,104.255 -275.787,94.195 -275.787,86.178 v1(-275.637,86.028)
FO_TX1: JB2.33 P1.36 | length 149.5
  Top Layer w0.3: JB2.33@-288.437,89.391 -288.437,95.494 -279.71,104.221 v3(-265.07,104.221) ; P1.36@-211.476,14.823 v3@-211.476,16.5
  Signal Layer 2 w0.4: v3(-265.07,104.221) -256.811,104.221 -211.477,58.887 v3(-211.477,16.501)
FO_TX2: JB2.35 P1.44 | length 152.5
  Top Layer w0.3: JB2.35@-289.237,89.391 -289.237,95.401 -279.447,105.191 v3(-263.78,105.191) ; P1.44@-209.476,14.823 v3@-209.476,16.5
  Signal Layer 2 w0.4: v3(-263.78,105.191) -256.701,105.191 -209.477,57.967 v3(-209.477,16.501)
FO_TX3: JB2.37 P1.56 | length 155.9
  Top Layer w0.3: JB2.37@-290.037,89.391 -290.037,95.308 -279.254,106.091 v3(-265.07,106.091) ; P1.56@-206.476,14.823 v3@-206.476,16.5
  Signal Layer 2 w0.4: v3(-265.07,106.091) -256.54,106.091 -206.477,56.028 v3(-206.477,16.501)
FO_TX4: JB2.39 P1.60 | length 158.3
  Top Layer w0.3: JB2.39@-290.837,89.391 -290.837,95.215 -279.032,107.021 v3(-263.78,107.021) ; P1.60@-205.476,14.823 v3@-205.476,16.5
  Signal Layer 2 w0.4: v3(-263.78,107.021) -256.622,107.021 -205.477,55.877 v3(-205.477,16.501)
FO_TX5: JB2.41 P1.64 | length 160.8
  Top Layer w0.3: JB2.41@-291.637,89.391 -291.637,95.122 -278.789,107.971 v3(-265.07,107.971) ; P1.64@-204.476,14.823 v3@-204.476,16.5
  Signal Layer 2 w0.4: v3(-265.07,107.971) -256.59,107.971 -204.478,55.858 v3(-204.478,16.501)
FO_TX6: JB2.43 P1.68 | length 163.4
  Top Layer w0.3: JB2.43@-292.437,89.391 -292.437,95.029 -278.456,109.011 v3(-263.78,109.011) ; P1.68@-203.476,14.823 v3@-203.476,16.5
  Signal Layer 2 w0.4: v3(-263.78,109.011) -256.701,109.011 -203.478,55.787 v3(-203.478,16.501)
FO_TX7: JB2.45 P1.72 | length 166.1
  Top Layer w0.3: JB2.45@-293.237,89.391 -293.237,94.936 -278.093,110.081 v3(-265.07,110.081) ; P1.72@-202.476,14.823 v3@-202.476,16.5
  Signal Layer 2 w0.4: v3(-265.07,110.081) -256.71,110.081 -202.478,55.848 v3(-202.478,16.501)
FO_TX8: JB2.47 P1.76 | length 168.6
  Top Layer w0.3: JB2.47@-294.037,89.391 -294.037,94.844 -277.81,111.071 v3(-263.78,111.071) ; P1.76@-201.476,14.823 v3@-201.476,16.5
  Signal Layer 2 w0.4: v3(-263.78,111.071) -256.701,111.071 -201.478,55.847 v3(-201.478,16.501)
FO_TX9: JB2.51 P1.24 | length 120.9
  Top Layer w0.3: P1.24@-214.476,14.823 v3@-214.476,16.5
  Top Layer w0.4: v7(-295.637,87.148) JB2.51@-295.637,89.056
  Signal Layer 2 w0.4: v7(-295.637,87.148) -295.637,85.615 -294.221,84.198 -288.537,84.198 -254.19,49.851 -237.665,49.851 -214.477,26.664 v3(-214.477,16.501)
FO_TX10: JB2.53 P1.20 | length 121.2
  Top Layer w0.3: P1.20@-215.476,14.823 v3@-215.476,16.5
  Top Layer w0.4: v7(-296.437,86.478) JB2.53@-296.437,89.056
  Signal Layer 2 w0.4: v7(-296.437,86.478) -296.437,84.885 -294.986,83.433 -289.302,83.433 -254.638,48.769 -237.431,48.769 -215.477,26.815 v3(-215.477,16.501)
FO_TX11: JB2.55 P1.16 | length 121.5
  Top Layer w0.3: P1.16@-216.476,14.823 v3@-216.476,16.5
  Top Layer w0.4: v7(-297.237,87.148) JB2.55@-297.237,89.056
  Signal Layer 2 w0.4: v7(-297.237,87.148) -297.237,84.208 -295.724,82.695 -290.041,82.695 -255.071,47.725 -237.236,47.725 -216.477,26.967 v3(-216.477,16.501)
FO_TX12: JB2.61 P2.75 | length 144.7
  Top Layer w0.3: JB2.61@-299.637,89.056 -299.637,90.994 v1(-298.06,92.571) ; v3(-201.475,153.229) P2.75@-201.476,154.907
  Bottom Layer w0.3: v1(-298.06,92.571) -232.879,92.571 -201.475,123.975 v3(-201.475,153.229)
FO_TX13: JB2.63 P2.71 | length 144.7
  Top Layer w0.3: JB2.63@-300.437,89.056 -300.437,91.88 -299.107,93.211 v1(-298.96,93.211) ; v3@-202.476,153.23 P2.71@-202.476,154.907
  Bottom Layer w0.3: v1(-298.96,93.211) -233.779,93.211 -202.475,124.515 v3(-202.475,153.229)
FO_TX14: JB2.65 P2.67 | length 144.1
  Top Layer w0.3: JB2.65@-301.237,89.056 -301.237,91.929 -299.195,93.971 v1(-298.06,93.971) ; v3@-203.476,153.23 P2.67@-203.476,154.907
  Bottom Layer w0.3: v1(-298.06,93.971) -234.679,93.971 -203.475,125.175 v3(-203.475,153.229)
FO_TX15: JB2.67 P2.63 | length 143.6
  Top Layer w0.3: JB2.67@-302.037,89.056 -302.037,91.836 -299.262,94.611 v1(-298.96,94.611) ; v3(-204.475,153.229) P2.63@-204.476,154.907
  Bottom Layer w0.3: v1(-298.96,94.611) -235.579,94.611 -204.475,125.715 v3(-204.475,153.229)
FO_TX16: JB2.69 P2.59 | length 142.9
  Top Layer w0.3: JB2.69@-302.837,89.056 -302.837,91.743 -299.209,95.371 v1(-298.06,95.371) ; v3@-205.476,153.23 P2.59@-205.476,154.907
  Bottom Layer w0.3: v1(-298.06,95.371) -236.479,95.371 -205.475,126.375 v3(-205.475,153.229)
FO_TX17: JB2.71 P2.55 | length 142.4
  Top Layer w0.3: JB2.71@-303.637,89.056 -303.637,91.65 -299.276,96.011 v1(-298.96,96.011) ; v3@-206.476,153.23 P2.55@-206.476,154.907
  Bottom Layer w0.3: v1(-298.96,96.011) -237.379,96.011 -206.475,126.915 v3(-206.475,153.229)
FO_TX18: JB2.73 P2.31 | length 139.6
  Top Layer w0.3: JB2.73@-304.437,89.056 -304.437,91.557 -299.384,96.611 -298.22,96.611 v1(-298.06,96.771) ; v3@-212.476,153.23 P2.31@-212.476,154.907
  Bottom Layer w0.3: v1(-298.06,96.771) -238.279,96.771 -212.475,122.575 v3(-212.475,153.229)
FO_TX19: JB2.75 P2.27 | length 139.1
  Top Layer w0.3: JB2.75@-305.237,89.056 -305.237,91.464 -299.291,97.411 v1(-298.96,97.411) ; v3@-213.476,153.23 P2.27@-213.476,154.907
  Bottom Layer w0.3: v1(-298.96,97.411) -239.179,97.411 -213.475,123.115 v3(-213.475,153.229)